# Altium PCB milliohm-adapter.PcbDoc
Units mm, origin at the board's own origin, x right, y up, seen from the top; angles counter-clockwise.
Board outline 25.4 x 13.4 mm, 4 copper layers (Top Layer, Int1, Int2, Bottom Layer), stack 1.369 mm thick; 17 components, 8 nets, 51 pads, 12 vias.
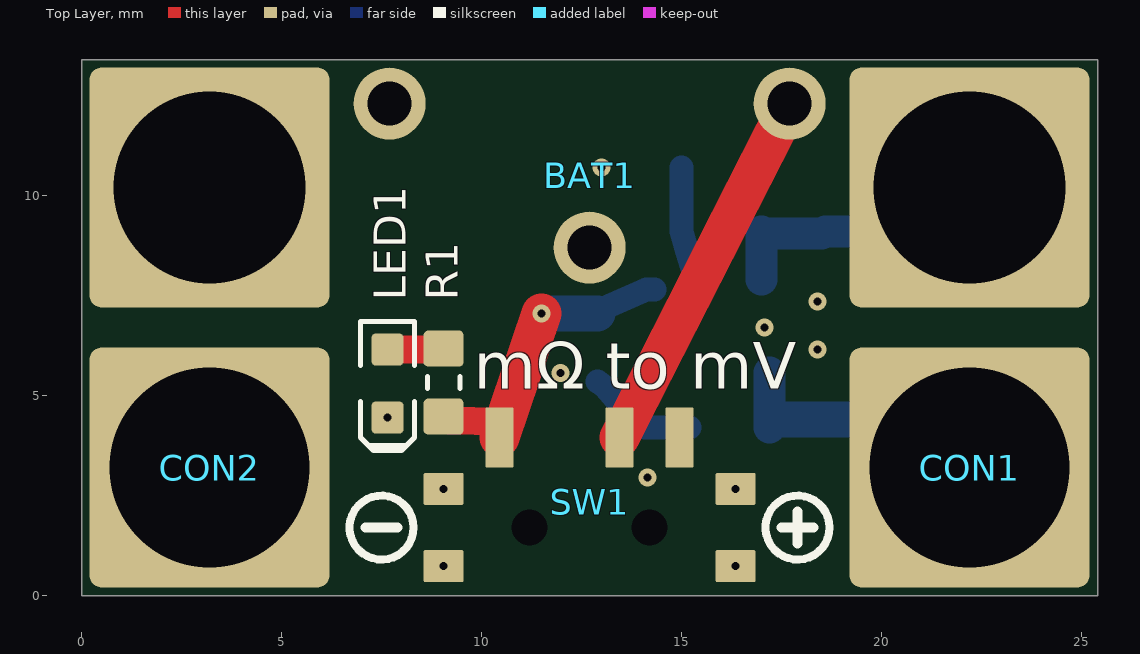
[diagram p0: Top Layer view]
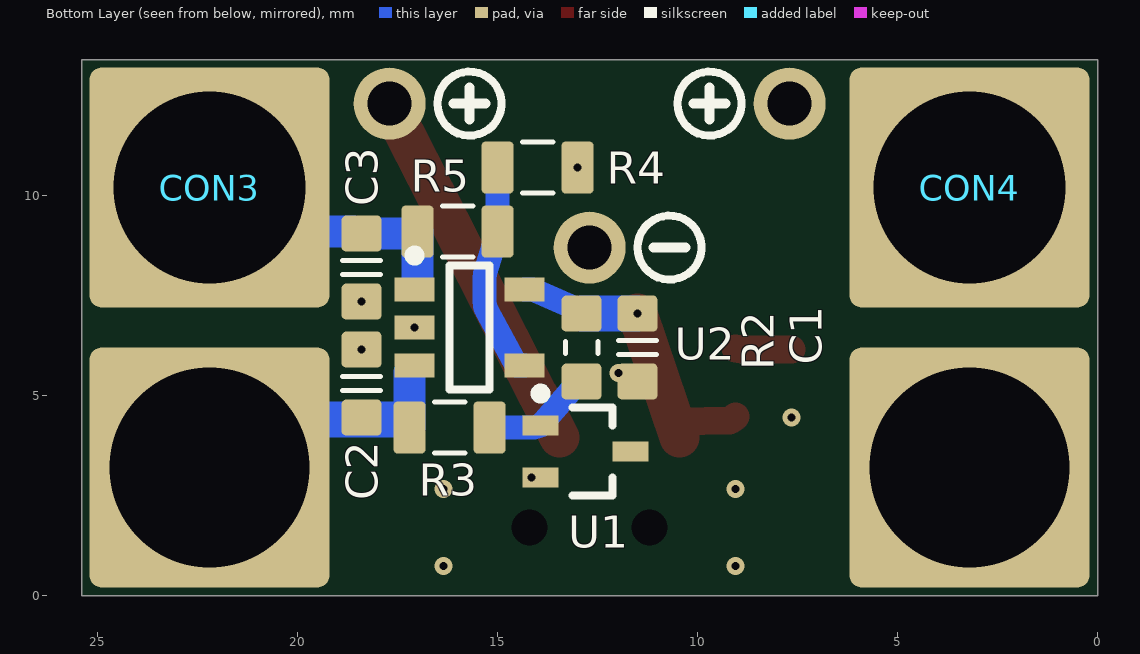
[diagram p1: Bottom Layer view, seen from below]
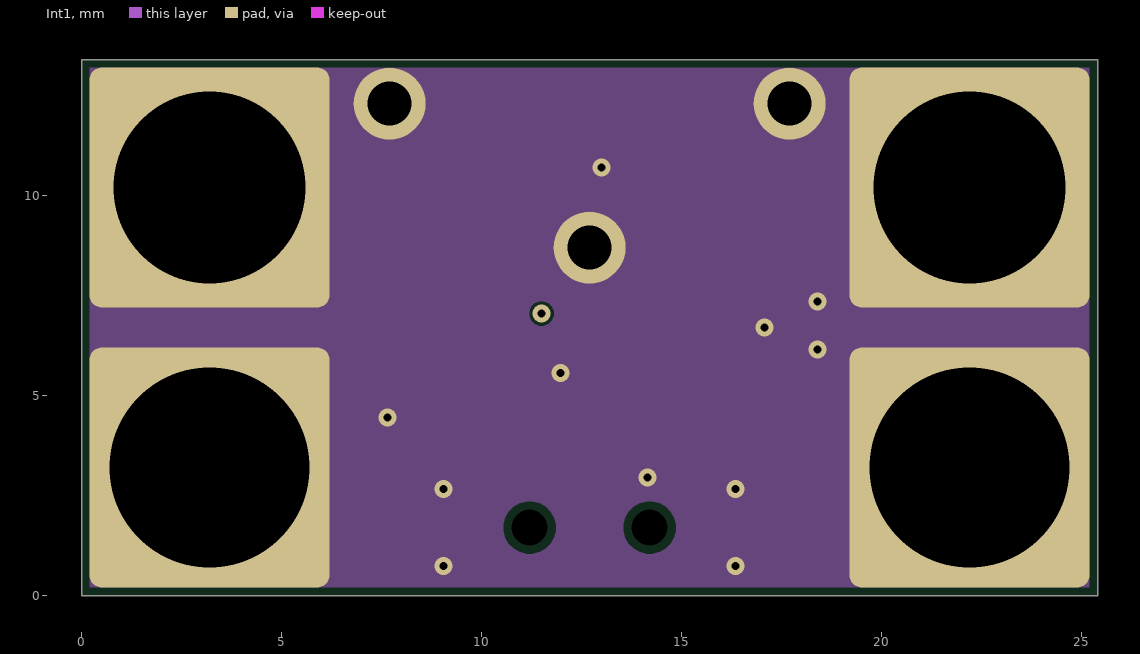
[diagram p2: Int1]
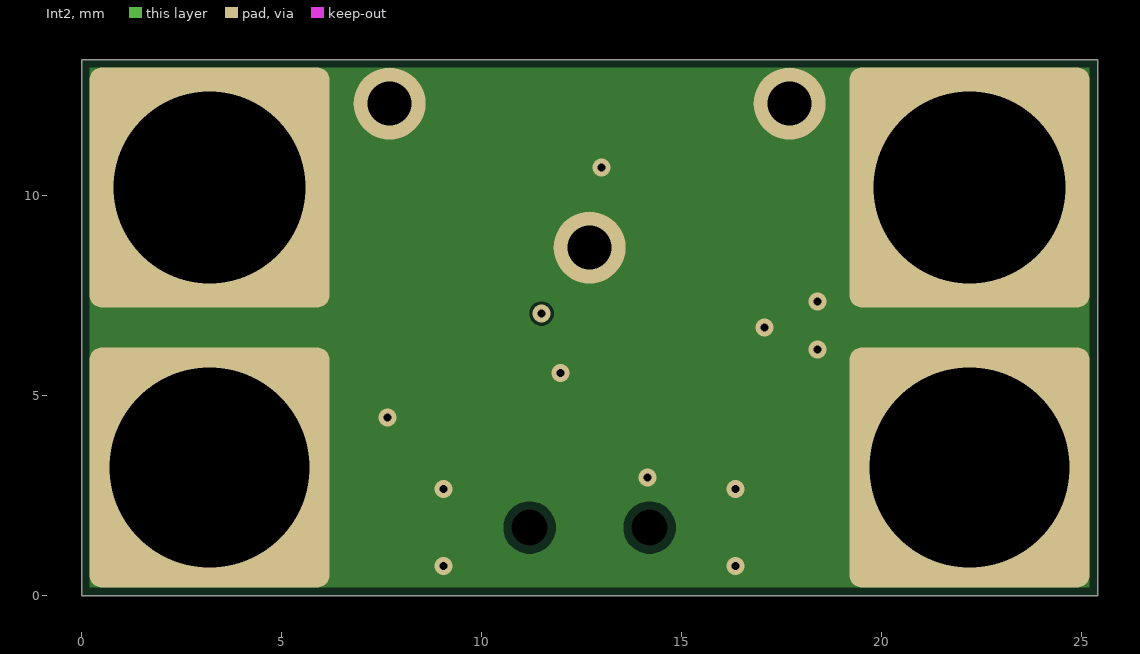
[diagram p3: Int2]
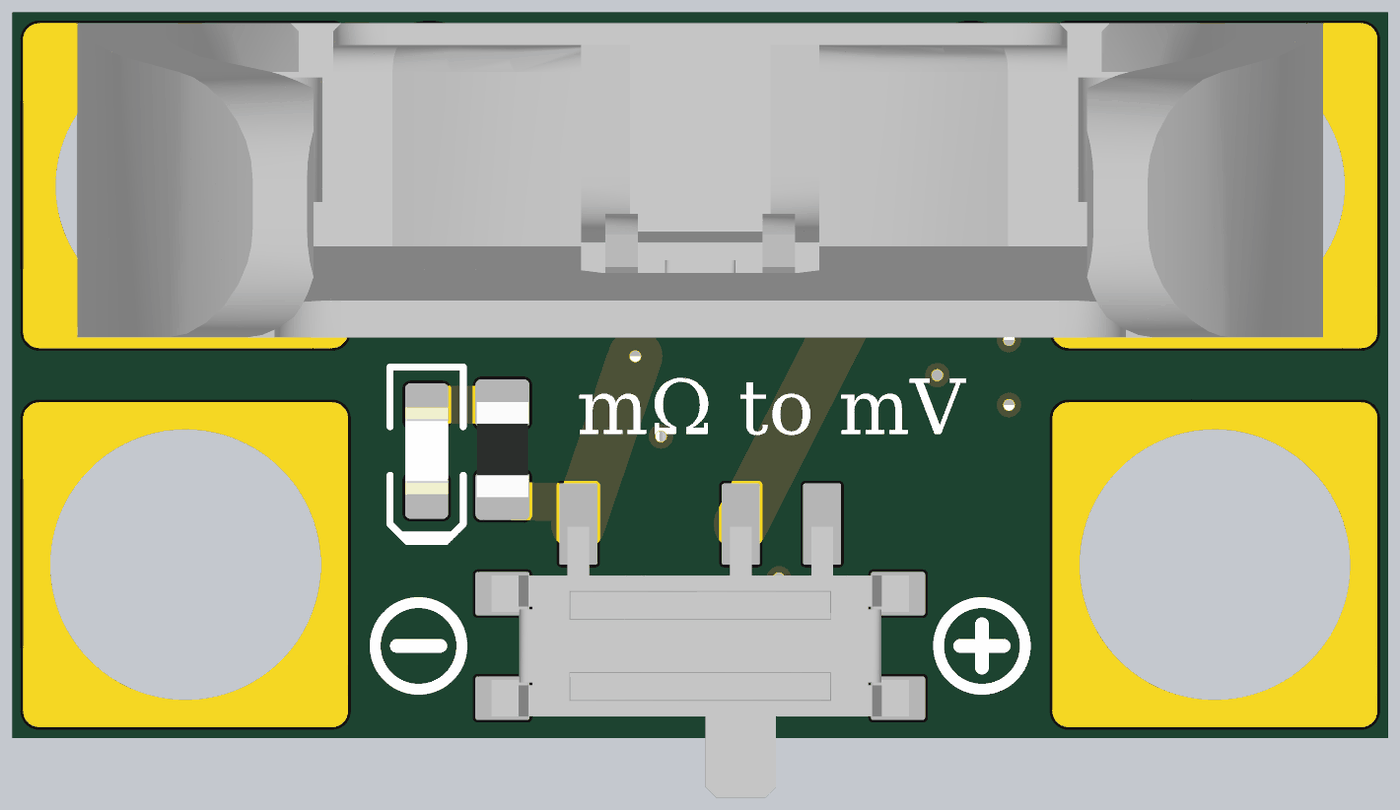
[diagram p4: 3D render of the assembled board from above, using the file's embedded part models]
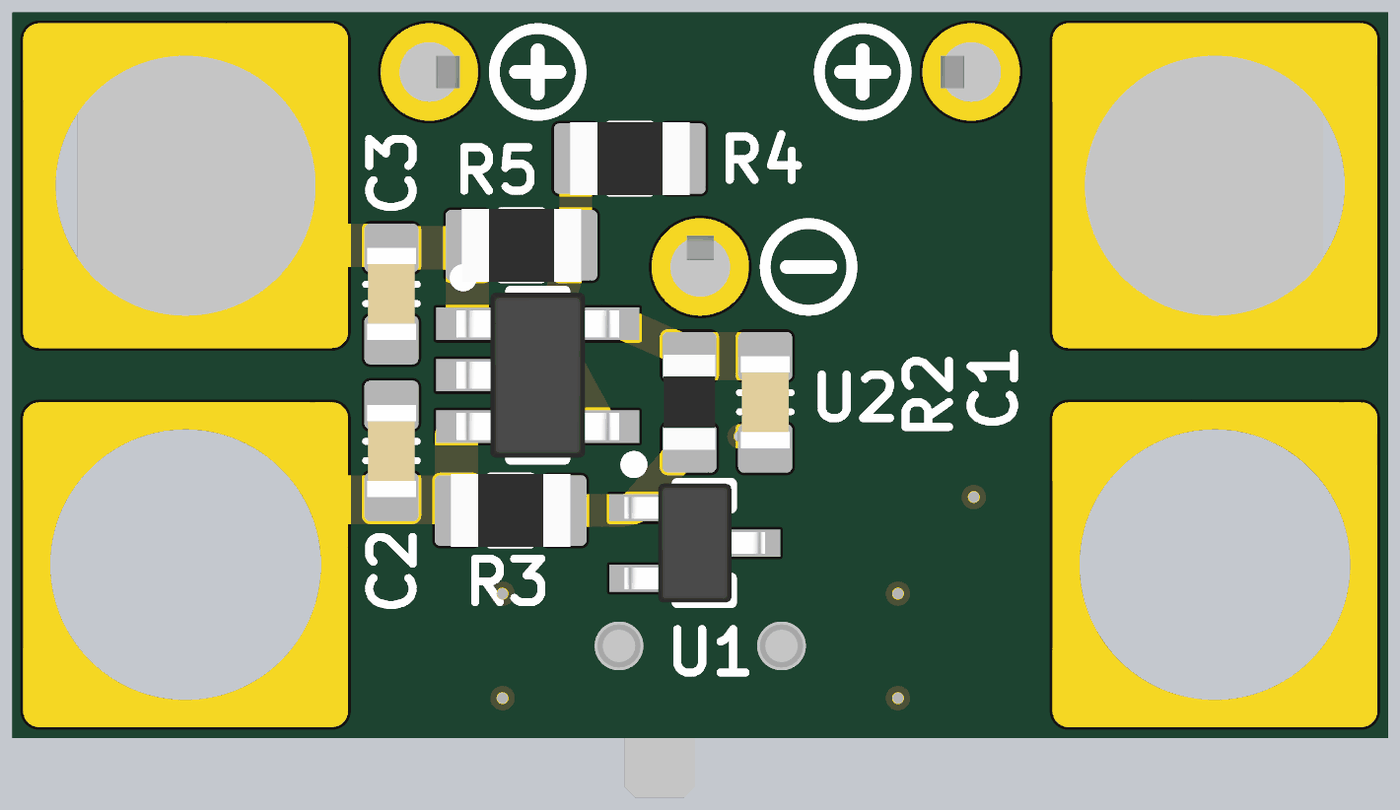
[diagram p5: 3D render of the assembled board from below, using the file's embedded part models]

## Layer stack, top to bottom
Top Solder: solder mask 0.0254, SM-001, Dk 4
Top Layer: signal copper 0.035
Dielectric 1: prepreg 0.1295, PP-017, Dk 4.3
Dielectric 2: prepreg 0.1295, PP-017, Dk 4.3
Int1: signal copper 0.035
Dielectric 3: core 0.7112, Core-039, Dk 4.8
Int2: signal copper 0.035
Dielectric 4: prepreg 0.1295, PP-017, Dk 4.3
Dielectric 5: prepreg 0.1295, PP-017, Dk 4.3
Bottom Layer: signal copper 0.035
Bottom Solder: solder mask 0.0254, SM-001, Dk 4

## Board outline
0,0 25.4,0 25.4,13.4 0,13.4

## Design rules (kind name [scope] priority, off if disabled: settings)
BoardOutlineClearance [All] p1: gap=0.2 ignorepadtopadclearanceinfootprint=FALSE except(0: Arc-SplitContinuation Track-SplitContinuation SMDPad-SplitContinuation THPad-SplitContinuation Via-SplitContinuation Fill-SplitContinuation Poly-SplitContinuation Region-SplitContinuation Text-SplitContinuation)
Clearance [All] p1: gap=0.2 ignorepadtopadclearanceinfootprint=TRUE except(0: Arc-Hole Track-Hole SMDPad-Hole THPad-Hole Via-Hole Fill-Hole Poly-Hole Region-Hole Text-Hole)
ComponentClearance [All] p1: gap=0.2 collisioncheckmode=3 verticalgap=0.254 showdistances=FALSE
HoleSize [All] p1: absolutevalues=TRUE maxlimit=6.3 minlimit=0.2 maxpercent=80.000 minpercent=20.000
HoleToHoleClearance [All] p1: gap=0.5 allowstackedmicrovias=TRUE
MinimumSolderMaskSliver [All] p1: minsoldermaskwidth=0.1
PlaneClearance [All] p1: clearance=0.2
PlaneConnect [All] p1: planeconnectstyle=Direct reliefexpansion=0.508 reliefentries=4 reliefconductorwidth=0.254 reliefairgap=0.254
PolygonConnect [All] p1: connectstyle=Direct reliefconductorwidth=0.254 reliefentries=4 polygonreliefangle="90 Angle" airgapwidth=0.254
RoutingVias [All] p1: holewidth=0.2 width=0.45 viastyle="Through Hole" minholewidth=0.2 minwidth=0.45 maxholewidth=3 maxwidth=5
SilkToSilkClearance [All] p1: silktosilkclearance=0.2
SilkToSolderMaskClearance [IsPad] p1: minsilkscreentomaskgap=0.2 clearancetoexposedcopper=TRUE
SolderMaskExpansion SolderMaskExpansionVia [IsVia] p1: expansion=0.05 istentingtop=TRUE
SolderMaskExpansion [All] p2: expansion=0.05 istentingtop=FALSE
Width [All] p1: maxlimit=5 minlimit=0.2 preferedwidth=0.2
22 further rules are at their usual default settings.

## Components (designator, comment, footprint, x,y, rotation, side; value= is the part's Value field where it differs from the comment)
BAT1 "TE_2-1775485-1" TE_2-1775485-1 12.7,10.3 r180 top
C1 "approved sub OK" CAPC1608X90N 11.5,6.2 r270 bottom value=100n
C2 "approved sub OK" CAPC1608X90N 18.4,5.3 r90 bottom value=100n
C3 "approved sub OK" CAPC1608X90N 18.4,8.2 r270 bottom value=100n
CON1 "PROBE+" AMASS-GC4010-F-THT 22.2,3.2 r180 top
CON2 "PROBE-" AMASS-GC4010-F-THT 3.2,3.2 r180 top
CON3 "OUT+" AMASS-GC4010-M-THT 22.2,10.2 r180 bottom
CON4 "OUT-" AMASS-GC4010-M-THT 3.2,10.2 r180 bottom
LED1 "White" LED-0603-WHITE 7.65,5.3 r270 top
R1 "Thick Film" RESC1608X55N 9.05,5.325 r90 top value=4K7
R2 "Thick Film" RESC1608X55N 12.9,6.2 r90 bottom value=100R
R3 "Thick Film" RESC2012X70N 16.2,4.2 r180 bottom value=510R
R4 "Thick Film" RESC2012X70N 14,10.7 r180 bottom value=510R
R5 "Thick Film" RESC2012X70N 16,9.1 r180 bottom value=510R
SW1 "PCM12SMTR" PCM12SMTR 12.7,1.7 r0 top
U1 "TS4061BICT-1.225" TS4061_SOT323-3L 12.8,3.6 r180 bottom
U2 "OPA333" TI_DBV0005A_SOT23-5 15.7,6.7 r180 bottom

## Footprints (in the part's own frame and the unit in brackets; to place one, negate y for a bottom-side part, rotate by r counter-clockwise, add the part's x,y. Pads: shape width x height; smd on the part's side, far side on the other; paste and mask are expansions set on the pad)
AMASS-GC4010-F-THT [mm]
  rrect10% 6x6 hole 5: 1(0,0)
  body extent -2.5,-2.5 2.5,2.5, height 19.5
AMASS-GC4010-M-THT [mm]
  rrect10% 6x6 hole 4.8: 1(0,0)
  body extent -2.4,-2.4 2.4,2.4, height 18.5
CAPC1608X90N [mm] "Chip Capacitor, Body 1.6x0.8mm, EIA 0603, IPC Medium Density"
  round 0.254 on Mech15: 0(0,0)
  rrect25% 0.9x1 smd: 1(-0.85,0) 2(0.85,0)
  Top Layer pour cut-out: -0.6,0.5 -0.4,0.7 0.4,0.7 0.6,0.5 0.6,-0.5 0.4,-0.7 -0.4,-0.7 -0.6,-0.5
  silkscreen extent -0.18,-0.48 0.18,0.48, body extent -0.85,-0.45 0.85,0.45, height 0.89
LED-0603-WHITE [mm]
  round 0.254 on Mech15: 0(0,0)
  rrect25% 0.8x0.8 smd: A(-0.85,0) K(0.85,0)
  Top Layer pour cut-out: -0.5,0.5 0.5,0.5 0.5,-0.5 -0.5,-0.5
  silkscreen extent -1.55,-0.67 1.68,0.67, body extent -0.8,-0.4 0.8,0.4, height 0.75
PCM12SMTR [mm]
  rrect10% 0.7x1.5 smd: 1(-2.25,2.25) 2(0.75,2.25) 3(2.25,2.25)
  rrect10% 0x0 hole 0.9 unplated: hole(-1.5,0) hole(1.5,0)
  rrect10% 1x0.8 smd: SH(-3.65,-0.965) SH(-3.65,0.965) SH(3.65,-0.965) SH(3.65,0.965)
  body extent -3.85,-2.8 3.85,2.2, height 1.4
RESC1608X55N [mm] "Chip Resistor, Body 1.6x0.8mm, EIA 0603, IPC Medium Density"
  round 0.254 on Mech15: 0(0,0)
  rrect25% 0.9x1 smd: 1(-0.85,0) 2(0.85,0)
  Top Layer pour cut-out: -0.6,0.5 -0.4,0.7 0.4,0.7 0.6,0.5 0.6,-0.5 0.4,-0.7 -0.4,-0.7 -0.6,-0.5
  silkscreen extent -0.15,-0.41 0.15,0.41, body extent -0.87,-0.47 0.88,0.48, height 0.54
RESC2012X70N [mm] "Chip Resistor, Body 2.0x1.2mm, EIA 0805, IPC Medium Density"
  round 0.254 on Mech15: 0(0,0)
  rrect25% 0.8x1.3 smd: 1(-1,0) 2(1,0)
  Top Layer pour cut-out: -0.725,0.65 -0.525,0.85 0.525,0.85 0.725,0.65 0.725,-0.65 0.525,-0.85 -0.525,-0.85 -0.725,-0.65
  silkscreen extent -0.38,-0.64 0.38,0.64, body extent -1.1,-0.67 1.1,0.68, height 0.69
TE_2-1775485-1 [mm] "CR2032 Battery Holder, Vertical"
  round 1.8 hole 1.1: minus(0,1.6) plus(-5,-2) plus(5,-2)
  body extent -11.5,-2.9 11.5,2.9, height 18.5
TI_DBV0005A_SOT23-5 [mm] "SOT23, 5-Leads, Body 2,90x2,80mm, Pitch 0,95mm, IPC Medium Density"
  rect 1x0.6 smd: 1(-1.375,0.95) 2(-1.375,0) 3(-1.375,-0.95) 4(1.375,-0.95) 5(1.375,0.95)
  silkscreen extent -1.5,-1.55 0.5,1.92, body extent -1.5,-1.53 1.5,1.53, height 1.45
TS4061_SOT323-3L [mm] "SOT23, 3-Leads, Body 2,00x2,10mm, Pitch 0,65mm, IPC Medium Density"
  rect 0.9x0.5 smd: 1(-1.125,0.65) 2(-1.125,-0.65) 3(1.125,0)
  silkscreen extent -1.25,-1.1 0.67,1.57, body extent -1.3,-1.1 1.3,1.1, height 1.1

## Part data
C1 C2 C3: library part CAPC_100n_0603_X7R_50V_10%, "Capacitor SMD Cer 100nF 10% 50V X7R 0603", Manufacturer 1="AVX Corporation", Manufacturer 2="TDK Corporation", Manufacturer Part Number 1=06035C104KAT2A, Manufacturer Part Number 2=C1608X7R1H104K, Package / Case="0603 (1608 Metric)", Ratings="50V; X7R", Supplier Part Number 1=478-5052-1-ND, Tolerance=±10%, ComponentLink1Description=http://www.avx.com/docs/Catalogs/cx7r.pdf, ComponentLink1URL=http://www.avx.com/docs/Catalogs/cx7r.pdf, ComponentLink2Description=http://product.tdk.com/capacitor/mlcc/en/documents/mlcc_commercial_general_en.pdf, ComponentLink2URL=http://product.tdk.com/capacitor/mlcc/en/documents/mlcc_commercial_general_en.pdf, Material=ceramic, SCDType=spec, Supplier 1=Digi-Key, Supplier 2=Digi-Key, Supplier Part Number 2=445-1314-1-ND
CON1 CON2 CON3 CON4: library part BULLET_4mm
LED1: library part LED_SMD_White_0603_Bright, "LED 0603 SMD Bright White 8700K", Luminous Flux @ Current - Test=-, Manufacturer 1="Lite-On Inc", Manufacturer 2="Kingbright Corp", Manufacturer Part Number 1=LTW-C193TS5, Manufacturer Part Number 2=APT1608QWF/D, Millicandela Rating=230mcd, Package / Case="0603 (1608 metric)", Ratings="Ultra Bright; 8700K", Supplier Part Number 1=160-1721-1-ND, Voltage - Forward (Vf) @ 10mA=3.0V, Voltage - Forward (Vf) Typ=3.3V, Color=White, ComponentLink1Description=http://media.digikey.com/pdf/Data%20Sheets/Lite-On%20PDFs/LTW-C193TS5.pdf, ComponentLink1URL=http://media.digikey.com/pdf/Data%20Sheets/Lite-On%20PDFs/LTW-C193TS5.pdf, ComponentLink2Description=http://www.kingbrightusa.com/images/catalog/SPEC/APT1608QWF-D.pdf, ComponentLink2URL=http://www.kingbrightusa.com/images/catalog/SPEC/APT1608QWF-D.pdf, Lens Style/Size="Rectangle with Flat Top, 0.8mm x 1.1mm", Lens Type="Clear, Tinted", Material=InGaN, Mounting Type="Surface Mount", SCDType=source, Size / Dimension="1.60mm L x 0.80mm W", Supplier 1=Digi-Key, Supplier 2=Digi-Key, Supplier Part Number 2=APT1608QWF/D-ND, Viewing Angle=120°
R1: library part RES_4K7_0603_5%, "Resistor SMD chip 4.7k Ohm 0.1W 5% 0603", Manufacturer 1=Vishay/Dale, Manufacturer Part Number 1=CRCW06034K70JNEA, Package / Case="0603 (1608 metric)", Ratings="1/10 W", Supplier Part Number 1=541-4.7KGCT-ND, Tolerance=±5%, Material="Thick Film", SCDType=spec, Supplier 1=Digi-Key
R2: library part RES_100R_0603_1%, "Resistor SMD chip 100 Ohm 0.1W 1% 0603", Manufacturer 1=Yageo, Manufacturer 2="Panasonic - ECG", Manufacturer Part Number 1=RC0603FR-07100RL, Manufacturer Part Number 2=ERJ-3EKF1000V, Package / Case="0603 (1608 Metric)", Ratings="1/10 W", Supplier Part Number 1=311-100HRCT-ND, Tolerance=±1%, ComponentLink1Description=http://industrial.panasonic.com/www-cgi/jvcr13pz.cgi?E+PZ+3+AOA0002+ERJ3EKF1000V+7+WW, ComponentLink1URL=http://industrial.panasonic.com/www-cgi/jvcr13pz.cgi?E+PZ+3+AOA0002+ERJ3EKF1000V+7+WW, Material="Thick Film", SCDType=spec, Supplier 1=Digi-Key, Supplier 2=Digi-Key, Supplier Part Number 2=P100HTR-ND
R3 R4 R5: library part RES_510R_0805_1%, "Resistor SMD chip 510 Ohm 0.125W 1% 0805", Manufacturer 1=Yageo, Manufacturer Part Number 1=RC0805FR-07510RL, Package / Case="0805 (2012 Metric)", Ratings="1/8 W", Supplier Part Number 1=311-510CRCT-ND, Tolerance=±1%, Material="Thick Film", SCDType=spec, Supplier 1=Digi-Key

## Via types
v1: diameter 0.45, hole 0.2, Top Layer to Bottom Layer, tented both sides, 12 vias

## Nets (pads, with @x,y where several pads share a name; then routed paths per layer and width w, separated by ;. In a path a pad name is that pad's centre, name@x,y a point inside that pad or via, vN(x,y) a via of type N, cw(c..) or ccw(c..) an arc to the next point about the centre after c; other vN are vias at no path point)
+IN: C2.1 CON1.1 R3.1 U2.3 | length 6.4
  Bottom Layer w0.8: R3.1 U2.3@17.2,5.582
  Bottom Layer w0.9: R3.1@17.475,4.4 18.5,4.4 18.55,4.4 19.65,4.4 CON1.1
+V: C1.1 R1.1 R2.2 SW1.1 U2.5 | length 8.1
  Top Layer w0.7: R1.1 9.2,4.375 10.45,4.35 SW1.1
  Top Layer w1: SW1.1 v1(11.5,7.05)
  Bottom Layer w0.6: R2.2 13.1,7.2 14.125,7.65 U2.5
  Bottom Layer w0.9: v1(11.5,7.05) 12.85,7.05 R2.2
-IN: R4.1 R5.2 U2.4 | length 5.4
  Bottom Layer w0.6: U2.4 14.525,5.75 15.264,7.111 ccw(c14.825,7.35) 15.325,7.35 15.325,7.95 ccw(c14.825,7.95) 15.302,8.098 15.1,8.75 R5.2 15,10.35 R4.1
BAT+: BAT1.plus SW1.2 | length 9.4
  Top Layer w1: SW1.2 13.979,4.997 cw(c14.635,4.665) 13.98,4.999 BAT1.plus@17.7,12.3
GND: BAT1.minus C1.2 C2.2 C3.2 CON2.1 CON4.1 LED1.K R4.2 SW1.SH U1.2 U2.2
  other v1: 9.05,0.735 16.35,0.735 9.05,2.665 16.35,2.665 14.15,2.95 7.65,4.45 11.975,5.569 18.4,6.15 17.075,6.7 18.4,7.35 13,10.7
NetLED1_A: LED1.A R1.2 | length 1.4
  Top Layer w0.7: LED1.A 7.7,6.151 8.9,6.151 R1.2
NetR2_1: R2.1 R3.2 U1.1 | length 2.8
  Bottom Layer w0.6: R2.1 13.1,5.2 U1.1@13.826,4.363 ; U1.1@13.826,4.363 U1.1 13.998,4.227 ccw(c14.177,4.8) 14.174,4.2 U1.1@14.188,4.2 ; U1.1@14.188,4.2 R3.2
OUT+: C3.1 CON3.1 R5.1 U2.1 | length 6.5
  Bottom Layer w0.8: U2.1@17,7.899 R5.1 ; R5.1@17.1,9.05 18.5,9.05 18.6,9.1 19.6,9.1 CON3.1
pads on no net: C1.0 C2.0 C3.0 LED1.0 R1.0 R2.0 R3.0 R4.0 R5.0 SW1.3 SW1.hole U1.3

## Polygon pours and split planes (outlines as drawn)
GND on Int1 "GND_L02_P000" (solid, remove dead copper, pour order 0): 0,0 25.4,0 25.4,13.4 0,13.4
GND on Int2 "GND_L03_P001" (solid, remove dead copper, pour order 1): 0,0 0,13.4 25.4,13.4 25.4,0

## Silkscreen, mask and mechanical layers (free items; w line width, h text height)
Top Overlay:
  circle w0.2: c17.9,1.7 r0.8
  circle w0.2: c7.5,1.7 r0.8
  lines w0.254: 7.1,1.7 7.9,1.7 ; 17.5,1.7 18.3,1.7 ; 17.9,1.3 17.9,2.1
  text "mΩ to mV" at 9.799,4.787 h2
Bottom Overlay:
  circle w0.2: c15.7,12.3 r0.8
  circle w0.2: c10.7,8.7 r0.8
  circle w0.2: c9.7,12.3 r0.8
  lines w0.254: 9.3,12.3 10.1,12.3 ; 9.7,11.9 9.7,12.7 ; 10.3,8.7 11.1,8.7 ; 15.3,12.3 16.1,12.3 ; 15.7,11.9 15.7,12.7
Mechanical 1:
  the board outline again, w0.1